# Altium PCB 2211B_SysArrosage_Auto_A.PcbDoc (part 1 of 2)
Units mm, origin at the board's own origin, x right, y up, seen from the top; angles counter-clockwise.
Board outline 107 x 107 mm, 2 copper layers (Top Layer, Bottom Layer), stack 1.586 mm thick; 94 components, 69 nets, 297 pads, 129 vias.
Unrouted connection lines stored in the file: 47.
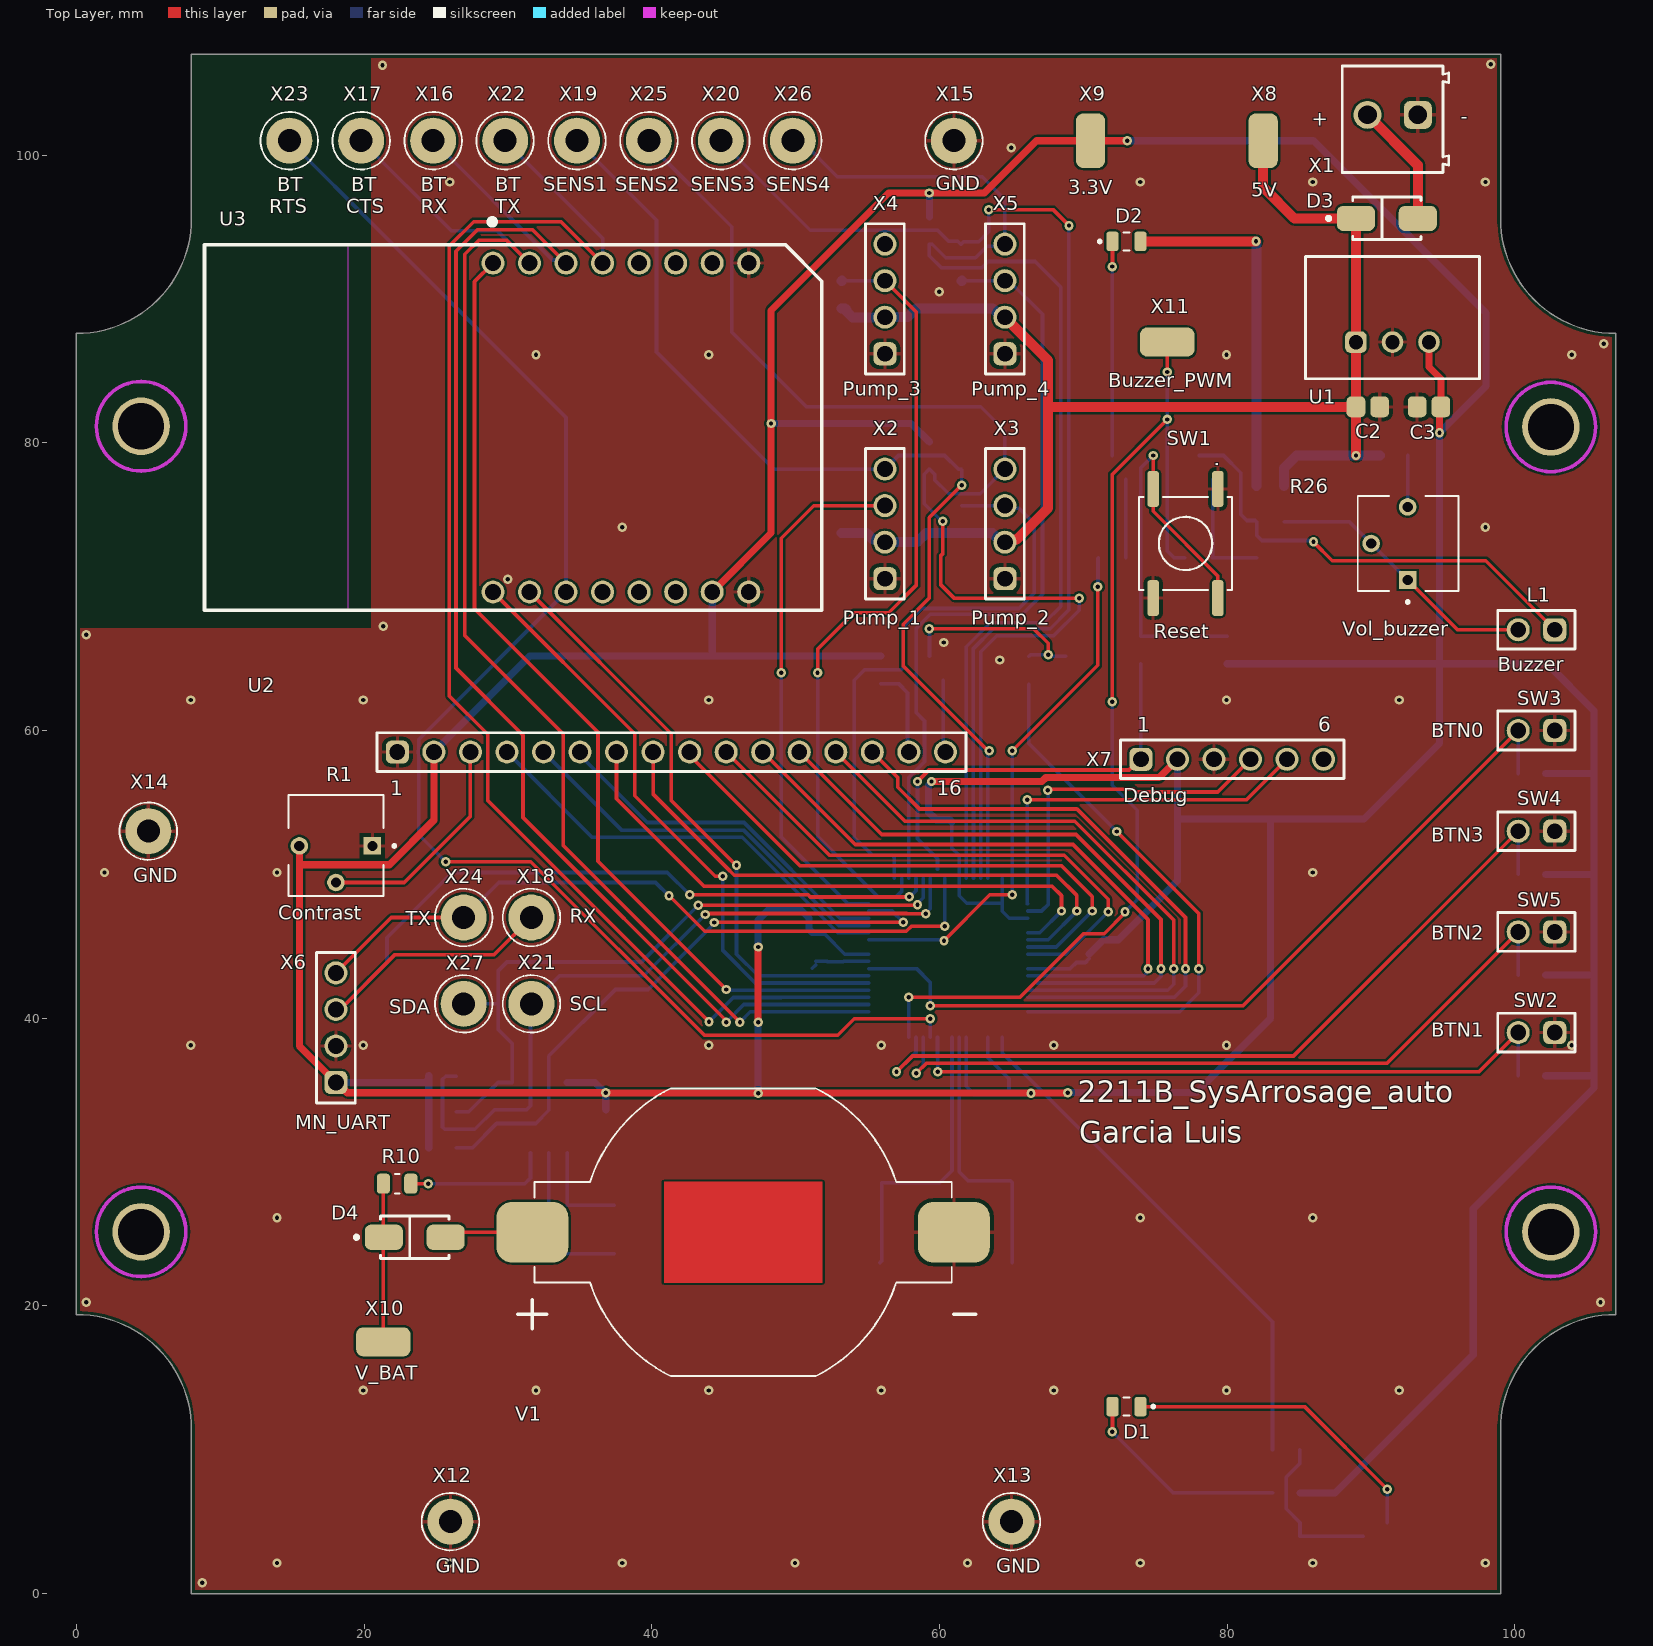
[diagram p0: Top Layer view]
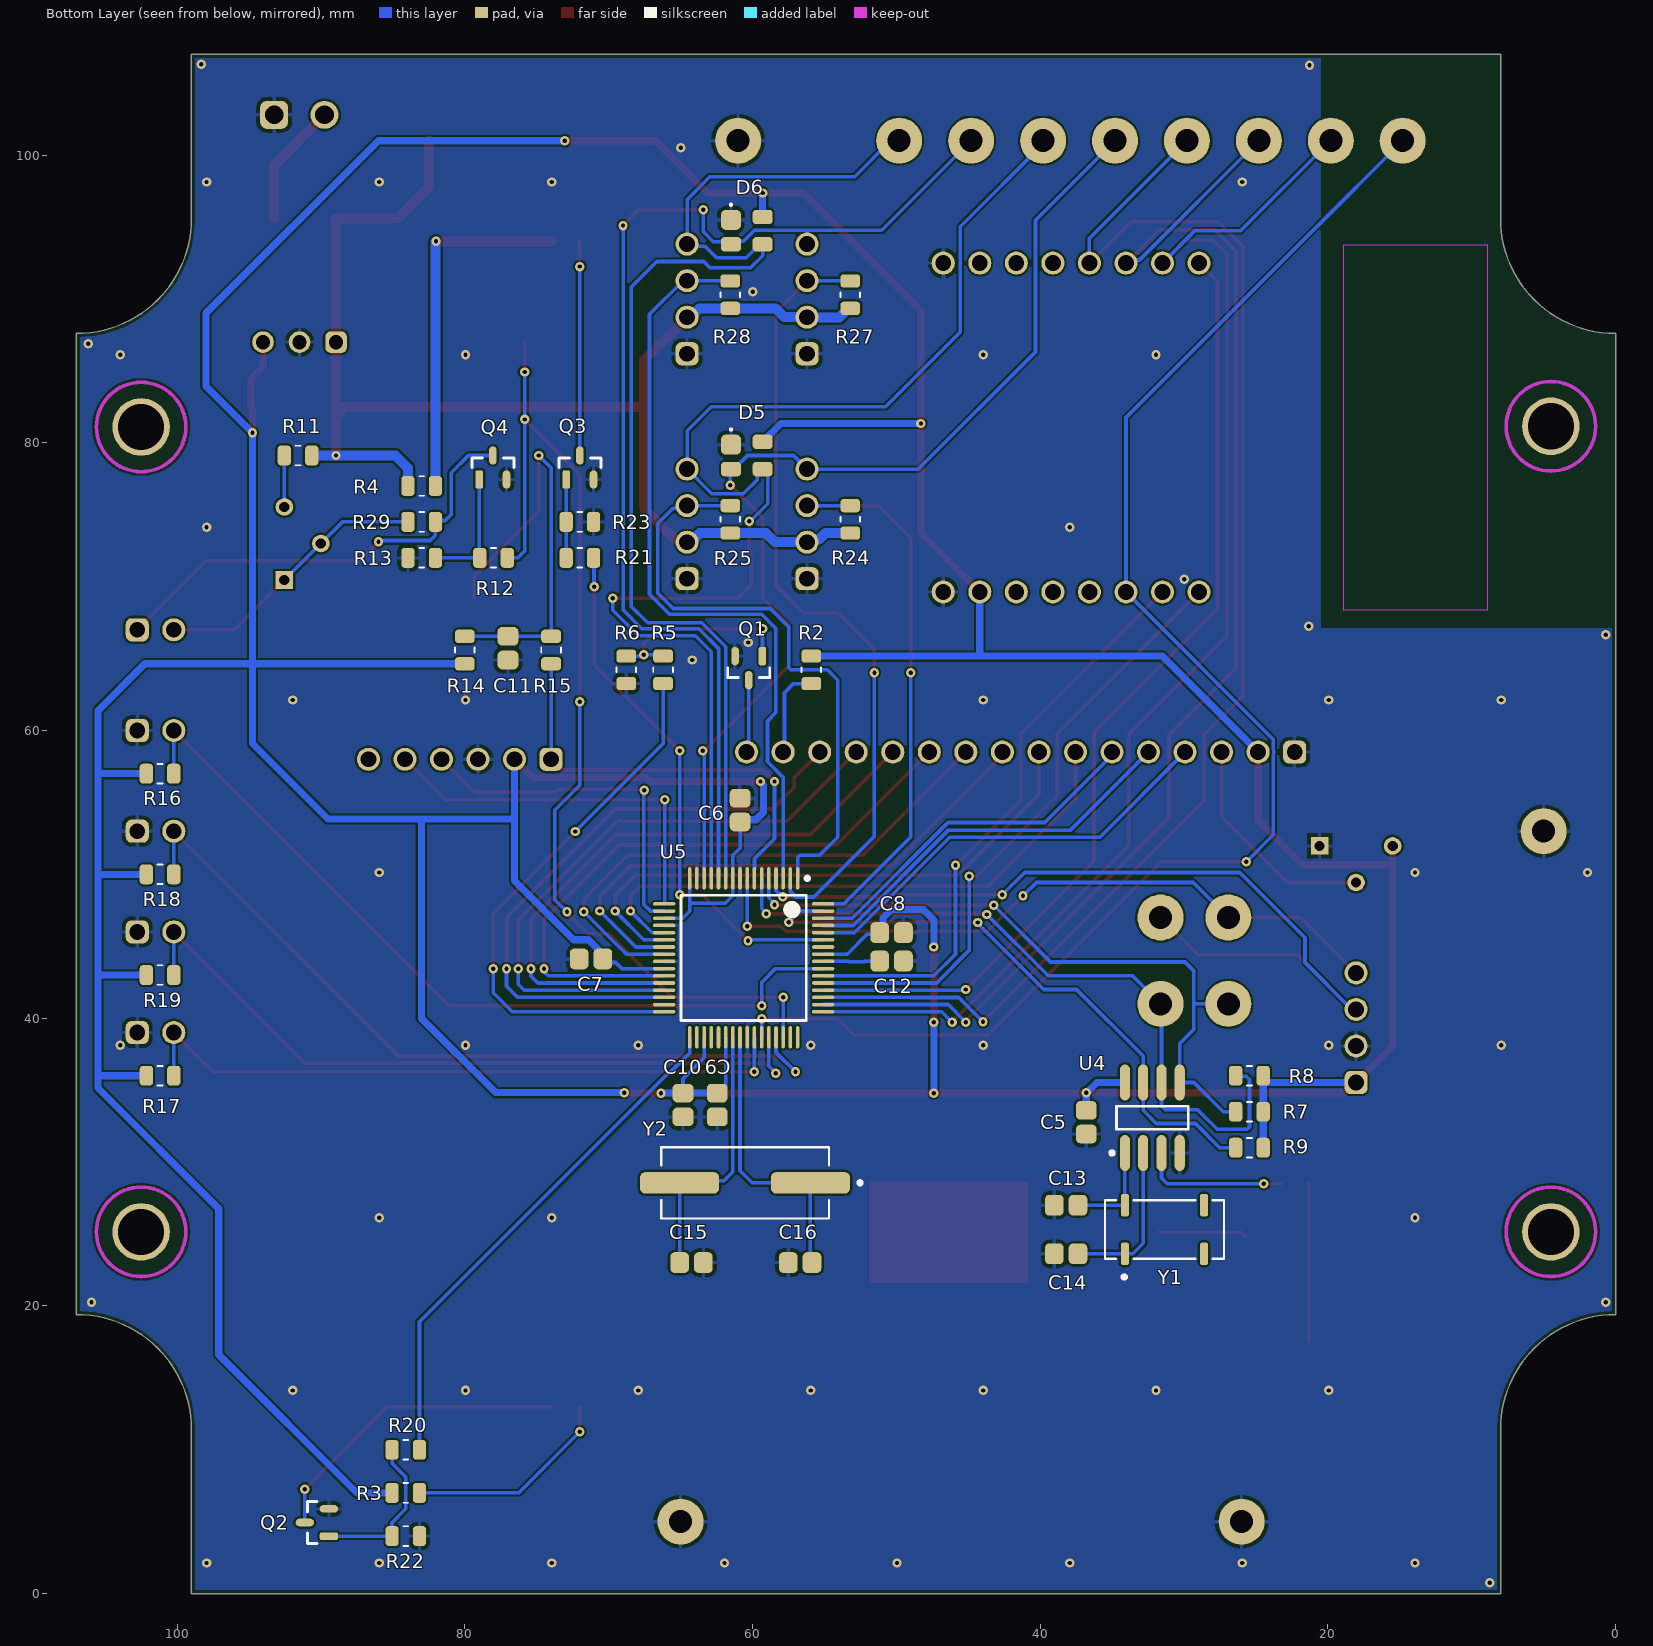
[diagram p1: Bottom Layer view, seen from below]
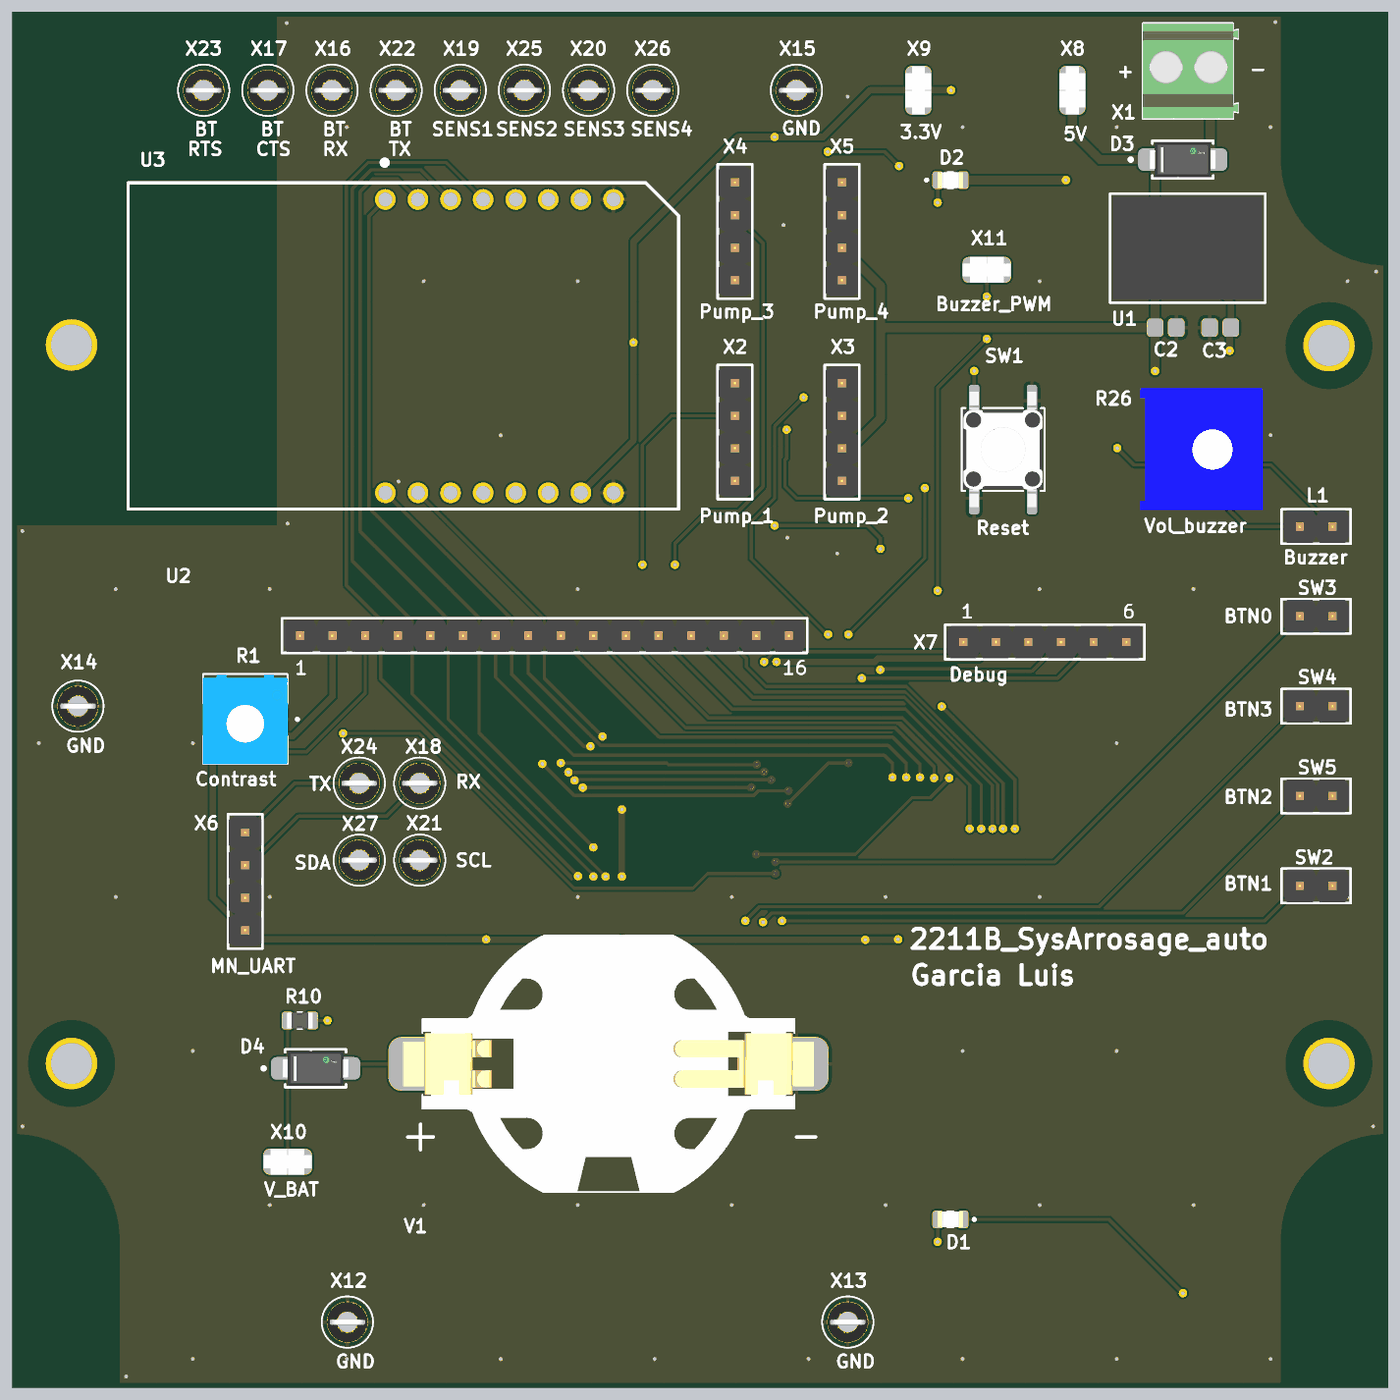
[diagram p2: 3D render of the assembled board from above, using the file's embedded part models]
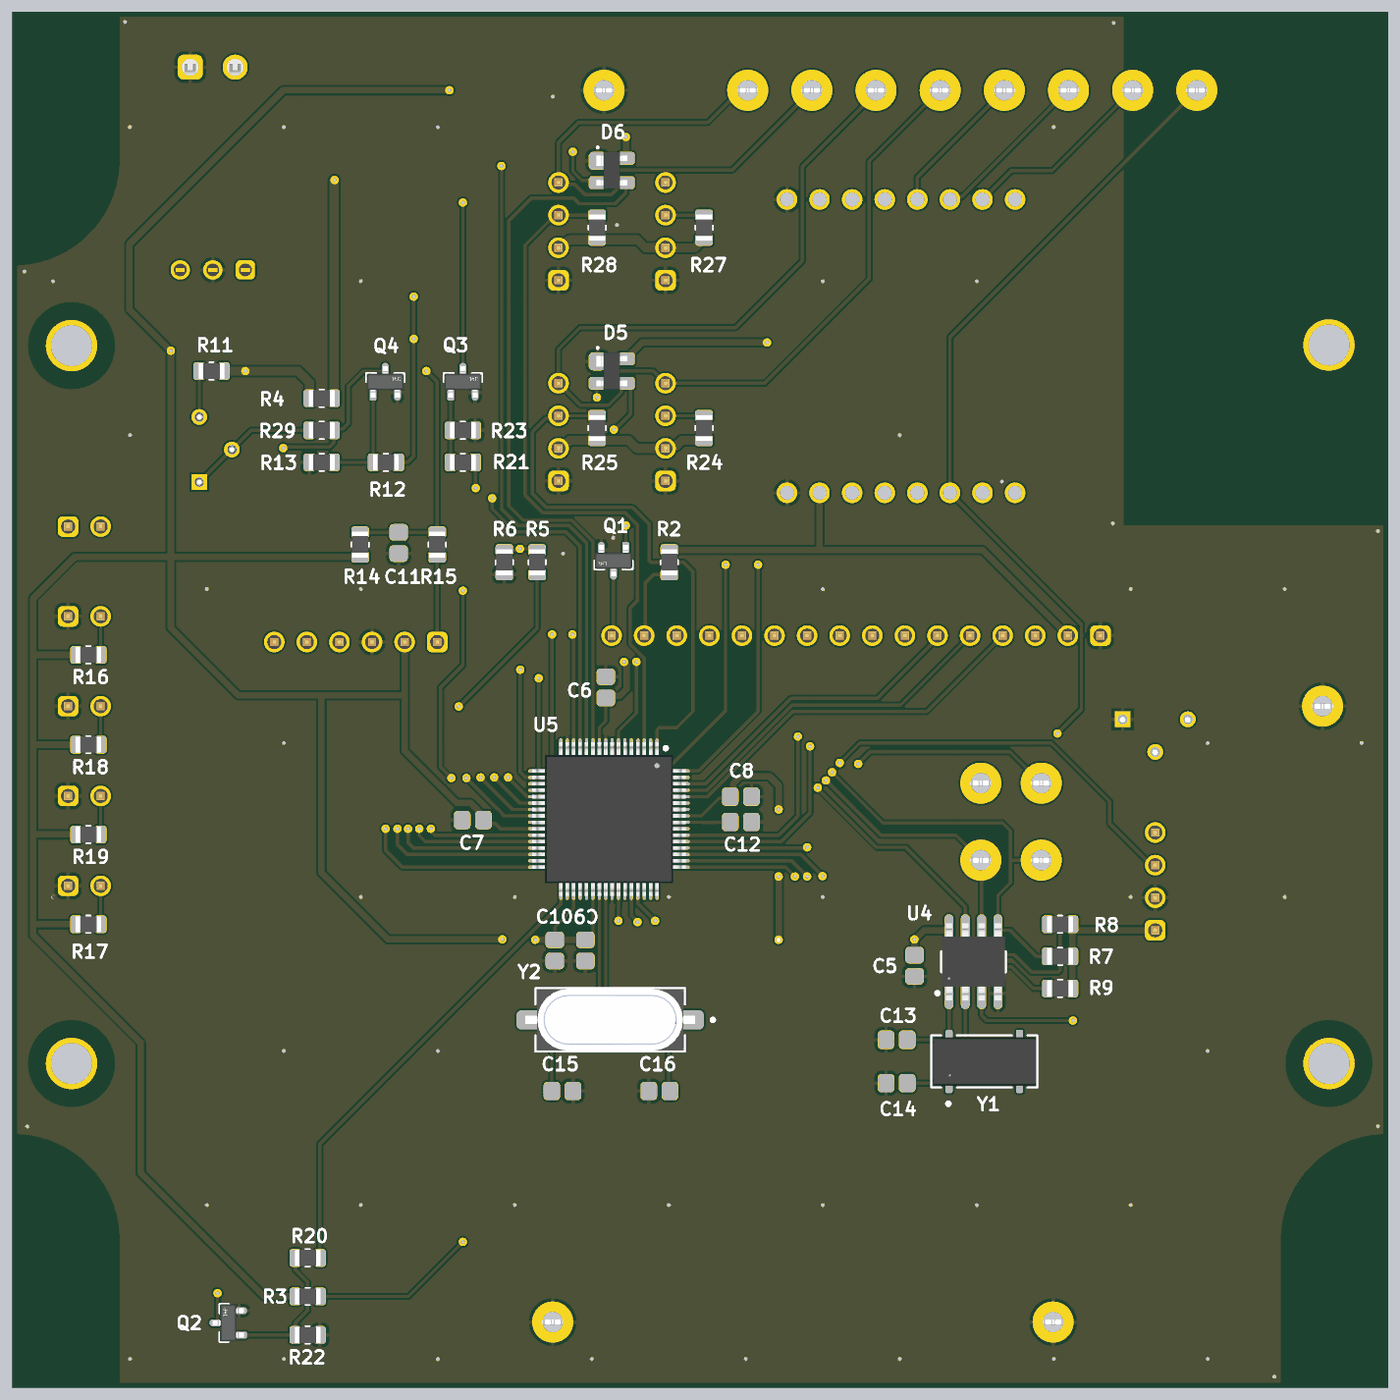
[diagram p3: 3D render of the assembled board from below, using the file's embedded part models]

## Layer stack, top to bottom
Top Solder: solder mask 0.0102, Solder Resist, Dk 3.5
Top Layer: signal copper 0.018
Dielectric1: core 1.55, FR-4, Dk 4.8
Bottom Layer: signal copper 0.018
Bottom Solder: solder mask 0.0102, Solder Resist, Dk 3.5

## Board outline
8,0 8,11.4 ccw(c0,11.4) 0,19.4 0,87.6 ccw(c0,95.6) 8,95.6 8,107 99,107 99,95.6 ccw(c107,95.6) 107,87.6 107,19.4 ccw(c107,11.4) 99,11.4 99,0

## Design rules (kind name [scope] priority, off if disabled: settings)
BoardOutlineClearance [All] p1: gap=0.25 ignorepadtopadclearanceinfootprint=FALSE except(0: Arc-SplitContinuation Track-SplitContinuation SMDPad-SplitContinuation THPad-SplitContinuation Via-SplitContinuation Fill-SplitContinuation Poly-SplitContinuation Region-SplitContinuation Text-SplitContinuation)
Clearance Clearance-xPP-xTP-xTT [All] p1: gap=0.151 ignorepadtopadclearanceinfootprint=TRUE
ComponentClearance [All] p1: gap=0.25 collisioncheckmode=3 verticalgap=0.25 showdistances=FALSE
DiffPairsRouting [All] p1: maxlimit=0.25 minlimit=0.25 mostfreqgap=0.25 toplayer_minwidth=0.381 toplayer_maxwidth=0.381 toplayer_prefwidth=0.381 bottomlayer_minwidth=0.381 bottomlayer_maxwidth=0.381 bottomlayer_prefwidth=0.381 maxuncoupledlength=12.5
Height [All] p1: minheight=0 maxheight=25 prefheight=12.5
HoleSize HoleSize-PTH [All] p1: absolutevalues=TRUE maxlimit=10 minlimit=0.25 maxpercent=80.000 minpercent=20.000
HoleToHoleClearance [All] p1: gap=0.35 allowstackedmicrovias=TRUE
MinimumAnnularRing "Minimum IAR  >0.45mm" [((ObjectKind = 'Pad') OR (ObjectKind = 'Via')) And (Layer = 'MultiLayer') And (HoleDiameter > AsMM(0.45))] p1: minimumring=0.125 // minimum inner annular ring for pads > 0.45mm finished hole size
MinimumAnnularRing "Minimum IAR <=0.45mm" [((ObjectKind = 'Pad') OR (ObjectKind = 'Via')) And (Layer = 'MultiLayer') And (HoleDiameter <= AsMM(0.45))] p2: minimumring=0.125 // minimum inner annular ring for pads <= 0.45mm finished hole size
MinimumSolderMaskSliver [All] p1: minsoldermaskwidth=0.08
PasteMaskExpansion [All] p1: expansion=-0.025
PlaneClearance PlaneClearance-IPI [All] p1: clearance=0.25
PlaneConnect [All] p1: planeconnectstyle=Relief reliefexpansion=0.175 reliefentries=4 reliefconductorwidth=0.2 reliefairgap=0.2
PolygonConnect PolygonConnect_GND [InNet('GND')] p1: thpad.connectstyle=Relief thpad.reliefconductorwidth=0.254 thpad.reliefentries=4 thpad.polygonreliefangle="90 Angle" thpad.airgapwidth=0.254 smdpad.connectstyle=Relief smdpad.reliefconductorwidth=0.254 smdpad.reliefentries=4 smdpad.polygonreliefangle="90 Angle" smdpad.airgapwidth=0.254 via.connectstyle=Direct via.reliefconductorwidth=0.254 via.reliefentries=4 via.polygonreliefangle="90 Angle" via.airgapwidth=0.254
PolygonConnect PolygonConnect-xTW [All] p2: connectstyle=Relief reliefconductorwidth=0.2 reliefentries=4 polygonreliefangle="90 Angle" airgapwidth=0.2
RoutingCorners [All] p1: cornerstyle=45-Degree minsetback=2.5 maxsetback=2.5
RoutingVias RoutingViasES [All] p1: holewidth=0.3 width=0.65 viastyle="Through Hole" minholewidth=0.25 minwidth=0.61 maxholewidth=0.45 maxwidth=0.8 // finishet hole size <= 0.45mm
SilkToSilkClearance [All] p1: silktosilkclearance=0.2
SilkToSolderMaskClearance SilkscreenOverComponentPads [IsPad] p1: minsilkscreentomaskgap=0.2 clearancetoexposedcopper=TRUE
SolderMaskExpansion [All] p1: expansion=0 istentingtop=FALSE
UnRoutedNet [All] p1: checkbadconnections=TRUE
Width Width-xTW [All] p1: maxlimit=1.5 minlimit=0.15 preferedwidth=0.2
17 further rules are at their usual default settings.

## Classes and differential pairs
component class 2211B_SysArrosageAuto_MCU: C6 C7 C8 C9 C10 C11 C12 C15 C16 D5 D6 R14 R15 R16 R17 R18 R19 SW1 SW2 SW3 SW4 SW5 U5 X7 X16 X17 X18 X19 X20 X21 X22 X23 X24 X25 X26 X27 Y2
component class 2211B_SysArrosage_auto: C2 C3 C5 C13 C14 D1 D2 D3 D4 L1 Q1 Q2 Q3 Q4 R1 R2 R3 R4 R5 R6 R7 R8 R9 R10 R11 R12 R13 R20 R21 R22 R23 R24 R25 R26 R27 R28 R29 U1 U2 U3 U4 V1 X1 X2 X3 X4 X5 X6 X8 X9 X10 X11 X12 X13 X14 X15 Y1

## Components (designator, comment, footprint, x,y, rotation, side; value= is the part's Value field where it differs from the comment)
C2 "10uF" CAPC2013X145X48NL20T23 89.775,82.5 r180 top
C3 "22uF" CAPC2013X145X48NL20T23 94.03,82.5 r0 top
C5 "100nF" CAPC2013X145X48NL20T23 36.795,32.771 r90 bottom
C6 "100nF" CAPC2013X145X48NL20T23 60.859,54.466 r270 bottom
C7 "100nF" CAPC2013X145X48NL20T23 71.225,44.125 r180 bottom
C8 "100nF" CAPC2013X145X48NL20T23 50.334,45.948 r0 bottom
C9 "100nF" CAPC2013X145X48NL20T23 62.45,33.966 r90 bottom
C10 "100nF" CAPC2013X145X48NL20T23 64.832,33.966 r90 bottom
C11 "100nF" CAPC2013X145X48NL20T23 77,65.722 r90 bottom
C12 "10uF" CAPC2013X145X48NL20T23 50.334,43.973 r0 bottom
C13 "10pF" CAPC2013X145X48NL20T23 38.198,27 r180 bottom
C14 "10pF" CAPC2013X145X48NL20T23 38.198,23.622 r180 bottom
C15 "22pF" CAPC2013X145X48NL20T23 64.242,23.008 r0 bottom
C16 "22pF" CAPC2013X145X48NL20T23 56.687,23.008 r180 bottom
D1 "LED_Red_2A-1K" LEDC2012X75N 73,13 r180 top
D2 "LED_Green_2A-1K" LEDC2012X75N 73,94 r0 top
D3 "SS14" FP-403AE-MFG 91.1,95.6 r180 top
D4 "SS14" FP-403AE-MFG 23.522,24.773 r180 top
D5 "8240136" WE-TVS_SOT143-4L 60.395,79.121 r270 bottom
D6 "8240136" WE-TVS_SOT143-4L 60.395,94.75 r270 bottom
L1 "CPT-2521C-500" 61300211121 101.5,67 r180 top
Q1 "IRLML2402TRPBF" FP-MICRO3-IPC_C 60.26,64.335 r270 bottom
Q2 "IRLML2402TRPBF" FP-MICRO3-IPC_C 90.285,4.94 r0 bottom
Q3 "IRLML2402TRPBF" FP-MICRO3-IPC_C 72,78.281 r90 bottom
Q4 "IRLML2402TRPBF" FP-MICRO3-IPC_C 78.05,78.281 r90 bottom
R1 "1K" TRIM_3362P-1-1K 18.04,51.975 r180 top
R2 "15R" RESC2012X60N 55.915,64.215 r90 bottom
R3 "56R" RESC2012X60N 84.1,7 r0 bottom
R4 "82R" RESC2012X60N 83,77 r0 bottom value=86R
R5 "180R" RESC2012X60N 66.215,64.215 r90 bottom
R6 "100k" RESC2012X60N 68.775,64.215 r90 bottom
R7 "2.2K" RESC2012X60N 25.455,33.5 r180 bottom value=2.2k
R8 "2.2K" RESC2012X60N 25.455,36 r180 bottom value=2.2k
R9 "10K" RESC2012X60N 25.455,31 r180 bottom value=10k
R10 "180R" RESC2012X60N 22.295,28.5 r180 top
R11 "150R" RESC2012X60N 91.59,79.117 r180 bottom
R12 "180R" RESC2012X60N 78,72 r180 bottom
R13 "100K" RESC2012X60N 83,72 r0 bottom value=100k
R14 "10K" RESC2012X60N 80,65.592 r270 bottom value=10k
R15 "1k" RESC2012X60N 74,65.592 r270 bottom
R16 "10k" RESC2012X60N 101.185,57 r0 bottom
R17 "10k" RESC2012X60N 101.185,36 r0 bottom
R18 "10k" RESC2012X60N 101.186,50 r0 bottom
R19 "10k" RESC2012X60N 101.185,43 r0 bottom
R20 "180R" RESC2012X60N 84.1,10 r180 bottom
R21 "180R" RESC2012X60N 72,72 r180 bottom
R22 "100k" RESC2012X60N 84.1,4 r0 bottom
R23 "100k" RESC2012X60N 72,74.5 r0 bottom
R24 "10k" RESC2012X60N 53.205,74.676 r270 bottom
R25 "10k" RESC2012X60N 61.545,74.676 r270 bottom
R26 "5k" TRIM_3386P-1-502LF_5K 92.545,73 r90 top
R27 "10k" RESC2012X60N 53.205,90.3 r270 bottom
R28 "10k" RESC2012X60N 61.545,90.3 r270 bottom
R29 "1k" RESC2012X60N 83,74.5 r0 bottom
SW1 "430182043816" SOIC_82043816_WRE-L 77.1,73 r270 top
SW2 "Single-Pole,Single-Throw Switch" 61300211121 101.5,39 r180 top
SW3 "Single-Pole,Single-Throw Switch" 61300211121 101.5,60 r180 top
SW4 "Single-Pole,Single-Throw Switch" 61300211121 101.5,53 r180 top
SW5 "Single-Pole,Single-Throw Switch" 61300211121 101.5,46 r180 top
U1 "173950336" WPME-FDSM_SIP-3_L11.6W7.55H10.16 91.49,88.7 r0 top
U2 "NHD-0420AZ-FSW-GBW-33V3" NHD-0420AZ-FSW-GBW-33V3 12.31,61 r0 top locked
U3 "MIKROE-2545" "RN4678 CLICK V3" 8.91,68.36 r90 top
U4 "MCP79411-I" SOIC-SN8_M 32.205,33.081 r90 bottom
U5 "PIC32MX795F512HT-80I/PT" TQFP-PT64_L 60.615,44.198 r270 bottom
V1 "Pile 3V" BAT_BU2032SM-HD-G 46.35,25.122 r0 top
X1 "Header 1x2" 691214110002 91.5,102.5 r180 top
X2 "4P_header" 61300411121 56.205,74.361 r90 top
X3 "4P_header" 61300411121 64.544,74.361 r90 top
X4 "4P_header" 61300411121 56.205,90 r90 top
X5 "4P_header" 61300411121 64.545,90 r90 top
X6 "4P_header" 61300411121 18.04,39.341 r90 top
X7 "61300611121" 61300611121 80.35,58 r0 top
X8 "5019" KEYSTONE_5019 82.5,101 r90 top value=5011
X9 "5019" KEYSTONE_5019 70.5,101 r90 top value=5011
X10 "5019" KEYSTONE_5019 21.34,17.5 r180 top value=5011
X11 "5019" KEYSTONE_5019 75.831,87 r0 top value=5011
X12 "5011" Keystone_5011 26,5 r90 top
X13 "5011" Keystone_5011 65,5 r90 top
X14 "5011" Keystone_5011 5,53 r90 top
X15 "5011" Keystone_5011 61,101 r90 top
X16 "5011" Keystone_5011 24.8,101 r90 top
X17 "5011" Keystone_5011 19.8,101 r90 top
X18 "5011" Keystone_5011 31.635,47 r90 top
X19 "5011" Keystone_5011 34.8,101 r90 top
X20 "5011" Keystone_5011 44.8,101 r90 top
X21 "5011" Keystone_5011 31.635,41 r90 top
X22 "5011" Keystone_5011 29.8,101 r90 top
X23 "5011" Keystone_5011 14.8,101 r90 top
X24 "5011" Keystone_5011 26.925,47 r90 top
X25 "5011" Keystone_5011 39.8,101 r90 top
X26 "5011" Keystone_5011 49.8,101 r90 top
X27 "5011" Keystone_5011 26.925,41 r90 top
Y1 "32.7680 kHz" SOJ_MC-306_EPS-M 31.36,25.311 r90 bottom
Y2 "8 MHz" ATS080BSM-1 60.52,28.553 r0 bottom

## Footprints (in the part's own frame and the unit in brackets; to place one, negate y for a bottom-side part, rotate by r counter-clockwise, add the part's x,y. Pads: shape width x height; smd on the part's side, far side on the other; paste and mask are expansions set on the pad)
61300211121 [mm] "Pin Header, pitch 2.54 mm, THT, Vertical, single row, 2p"
  rrect50% 1.6x1.6 hole 1.1: 1(-1.27,0)
  round 1.6 hole 1.1: 2(1.27,0)
  silkscreen extent -2.69,-1.35 2.69,1.35, body extent -2.54,-1.27 2.54,1.27, height 8.57
61300411121 [mm] "Pin Header, pitch 2.54 mm, THT, Vertical, single row, 4p"
  rrect50% 1.6x1.6 hole 1.1: 1(-3.81,0)
  round 1.6 hole 1.1: 2(-1.27,0) 3(1.27,0) 4(3.81,0)
  silkscreen extent -5.23,-1.35 5.23,1.35, body extent -5.08,-1.27 5.08,1.27, height 8.57
61300611121 [mm] "Pin Header, pitch 2.54 mm, THT, Vertical, single row, 6p"
  rrect50% 1.6x1.6 hole 1.1: 1(-6.35,0)
  round 1.6 hole 1.1: 2(-3.81,0) 3(-1.27,0) 4(1.27,0) 5(3.81,0) 6(6.35,0)
  silkscreen extent -7.77,-1.35 7.77,1.35, body extent -7.62,-1.27 7.62,1.27, height 8.57
691214110002 [mm] "3.50 mm Horizontal Entry Modular, 2p"
  rrect50% 1.95x1.95 hole 1.3: 1(-1.75,-0.3)
  round 1.95 hole 1.3: 2(1.75,-0.3)
  silkscreen extent -3.9,-3.7 3.5,3.7, body extent -3.95,-3.7 3.5,3.7, height 8.55
ATS080BSM-1 [mm]
  rrect50% 5.5x1.5 smd paste+0 mask+0: 1(-4.547,0) 2(4.547,0)
  silkscreen extent -8.12,-2.48 5.83,2.48, body extent -6.6,-2.4 6.6,2.4, height 3.2
BAT_BU2032SM-HD-G [mm]
  rrect50% 5x4.2 smd: 1(-14.65,0) 2(14.65,0)
  Top Layer region: 5.5,-3.5 -5.5,-3.5 -5.5,3.5 5.5,3.5
  silkscreen extent -15.65,-10 16.15,10, body extent -16,-10 16,10, height 5.3
CAPC2013X145X48NL20T23 [mm] "Chip Capacitor, 2-Leads, Body 2.00x1.25mm, IPC Medium Density"
  rrect50% 1.3x1.45 smd: 1(-0.825,0) 2(0.825,0)
  body extent -1.1,-0.72 1.1,0.72, height 1.45
FP-403AE-MFG [mm]
  rrect50% 2.65x1.75 smd paste+0 mask+0: 1(-2.15,0) 2(2.15,0)
  silkscreen extent -2.37,-1.48 4.17,1.48, body extent -3.57,-1.58 3.57,1.58, height 0.25
FP-MICRO3-IPC_C [mm]
  rrect50% 1.274x0.532 smd paste+0 mask+0: 1(-0.835,0.95)
  rrect100% 1.274x0.532 smd paste+0 mask+0: 2(-0.835,-0.95) 3(0.835,0)
  silkscreen extent 0,-1.46 0.65,1.46, body extent -1.22,-1.46 1.22,1.46, height 1.12
Keystone_5011 [mm]
  round 3.2 hole 1.6 paste-100: 1(0,0)
  silkscreen extent -2,-2 2,2, body extent -1.59,-1.59 1.59,1.59, height 8.13
KEYSTONE_5019 [mm]
  rrect50% 3.8x2.03 smd: 1(0,0)
  body extent -1.91,-1.01 1.91,1.01, height 2.29
LEDC2012X75N [mm]
  rrect50% 0.86x1.36 smd: 1(-0.975,0) 2(0.975,0)
  silkscreen extent -1.96,-0.63 0.22,0.63, body extent -1,-0.63 1,0.63, height 0.75
NHD-0420AZ-FSW-GBW-33V3 [mm]
  rrect50% 1.6x1.6 hole 1.1: 1(10,-2.5)
  round 1.6 hole 1.1: 2(12.54,-2.5) 3(15.08,-2.5) 4(17.62,-2.5) 5(20.16,-2.5) 6(22.7,-2.5) 7(25.24,-2.5) 8(27.78,-2.5) 9(30.32,-2.5) 10(32.86,-2.5) 11(35.4,-2.5) 12(37.94,-2.5) 13(40.48,-2.5) 14(43.02,-2.5) 15(45.56,-2.5) 16(48.1,-2.5)
  silkscreen extent 8.58,-3.85 49.52,-1.15, body extent 8.73,-3.77 49.37,-1.23, height 8.57
RESC2012X60N [mm]
  rrect50% 0.92x1.38 smd: 1(-0.955,0) 2(0.955,0)
  silkscreen extent -0.17,-0.68 0.17,0.68, body extent -1,-0.63 1,0.63, height 0.6
"RN4678 CLICK V3" [mm]
  round 1.6 hole 1.1: 1(24.13,-20.05) 2(24.13,-22.59) 3(24.13,-25.13) 4(24.13,-27.67) 5(24.13,-30.21) 6(24.13,-32.75) 7(24.13,-35.29) 8(24.13,-37.83) 9(1.27,-37.83) 10(1.27,-35.29) 11(1.27,-32.75) 12(1.27,-30.21) 13(1.27,-27.67) 14(1.27,-25.13) 15(1.27,-22.59) 16(1.27,-20.05)
  Keep-Out Layer region: 0,-10 25.4,-10 25.4,0 0,0
  silkscreen extent 0,-42.9 27.15,0
SOIC-SN8_M [mm] "SOIC, 8-Leads, Body 4.9x3.9mm, Pitch 1.27mm, IPC Low Density"
  oval 2.5x0.7 smd: 1(-2.45,1.905) 2(-2.45,0.635) 3(-2.45,-0.635) 4(-2.45,-1.905) 5(2.45,-1.905) 6(2.45,-0.635) 7(2.45,0.635) 8(2.45,1.905)
  silkscreen extent -2.57,-2.5 0.8,2.93, body extent -3,-2.45 3,2.45, height 1.76
SOIC_82043816_WRE-L [mm]
  rrect50% 2.5x0.8 smd paste+0 mask+0: 1(-3.797,2.25) 2(-3.797,-2.25) 3(3.797,-2.25) 4(3.797,2.25)
  silkscreen extent -3.23,-3.23 3.23,3.23, body extent -4.5,-3.1 4.5,3.1, height 4.3
SOJ_MC-306_EPS-M [mil]
  rrect50% 61x22 smd paste+0 mask+0: 1(-66.5,108.27) 2(-66.5,-108.27) 3(66.5,-108.27) 4(66.5,108.27)
  silkscreen extent -135,-162 80,162, body extent -75,-160 75,155, height 67
TQFP-PT64_L [mm] "Thin QFP, 64-Leads, Body 10x10mm, Pitch 0.5mm, IPC High Density"
  oval 1.55x0.25 smd: 1(-5.525,3.75) 2(-5.525,3.25) 3(-5.525,2.75) 4(-5.525,2.25) 5(-5.525,1.75) 6(-5.525,1.25) 7(-5.525,0.75) 8(-5.525,0.25) 9(-5.525,-0.25) 10(-5.525,-0.75) 11(-5.525,-1.25) 12(-5.525,-1.75) 13(-5.525,-2.25) 14(-5.525,-2.75) 15(-5.525,-3.25) 16(-5.525,-3.75) 33(5.525,-3.75) 34(5.525,-3.25) 35(5.525,-2.75) 36(5.525,-2.25) 37(5.525,-1.75) 38(5.525,-1.25) 39(5.525,-0.75) 40(5.525,-0.25) 41(5.525,0.25) 42(5.525,0.75) 43(5.525,1.25) 44(5.525,1.75) 45(5.525,2.25) 46(5.525,2.75) 47(5.525,3.25) 48(5.525,3.75)
  oval 0.25x1.55 smd: 17(-3.75,-5.525) 18(-3.25,-5.525) 19(-2.75,-5.525) 20(-2.25,-5.525) 21(-1.75,-5.525) 22(-1.25,-5.525) 23(-0.75,-5.525) 24(-0.25,-5.525) 25(0.25,-5.525) 26(0.75,-5.525) 27(1.25,-5.525) 28(1.75,-5.525) 29(2.25,-5.525) 30(2.75,-5.525) 31(3.25,-5.525) 32(3.75,-5.525) 49(3.75,5.525) 50(3.25,5.525) 51(2.75,5.525) 52(2.25,5.525) 53(1.75,5.525) 54(1.25,5.525) 55(0.75,5.525) 56(0.25,5.525) 57(-0.25,5.525) 58(-0.75,5.525) 59(-1.25,5.525) 60(-1.75,5.525) 61(-2.25,5.525) 62(-2.75,5.525) 63(-3.25,5.525) 64(-3.75,5.525)
  silkscreen extent -5.65,-4.35 4.35,4.55, body extent -6,-6 6,6, height 1.2
TRIM_3362P-1-1K [mm]
  rect 1.222x1.222 hole 0.714: 1(-2.54,0)
  round 1.222 hole 0.714: 2(0,2.54) 3(2.54,0)
  silkscreen extent -4.16,-3.53 3.3,3.47, body extent -3.3,-3.49 3.3,3.49, height 4.88
TRIM_3386P-1-502LF_5K [mm]
  rect 1.222x1.222 hole 0.714: 1(-2.54,0)
  round 1.222 hole 0.714: 2(0,2.54) 3(2.54,0)
  silkscreen extent -4.16,-3.53 3.3,3.47, body extent -4.76,-4.76 4.76,4.76, height 4.83
WE-TVS_SOT143-4L [mm] "TVS Diode, package SOT143-4L"
  rrect50% 1.4x1.4 smd: 1(-0.75,-1.1)
  rrect50% 1x1.4 smd: 2(0.95,-1.1) 3(0.95,1.1) 4(-0.95,1.1)
  silkscreen extent -1.87,-1.18 -1.73,-1.03, body extent -1.46,-1.2 1.46,1.2, height 1.05
WPME-FDSM_SIP-3_L11.6W7.55H10.16 [mm] "Fixed Step Down Regulator Module, SIP-3, body 11.60x7.55mm"
  rrect50% 1.5x1.5 hole 1: 1(-2.54,-1.7)
  round 1.5 hole 1: 2(0,-1.7) 3(2.54,-1.7)
  silkscreen extent -6.05,-4.25 6.05,4.25, body extent -5.8,-4 5.8,4, height 10.5

## Part data
C2 C3 C5 C6 C7 C8 C9 C10 C11 C12 C13 C14 C15 C16: library part Capacitor_Non-Polarized
  C2 C12: Capacité=10uF
  C3: Capacité=22uF
  C5 C6 C7 C8 C9 C10 C11: Capacité=100nF
  C13 C14: Capacité=10pF
  C15 C16: Capacité=22pF
D1: "LED Uni-Color Hyper Red 640nm 2-Pin Chip LED T/R", Case Code (Imperial)=0805, Case Code (Metric)=2012, Color=Red, Forward Current=20mA, Forward Voltage=2.2V, Lens Color=Colorless, Manufacturer=Kingbright, Manufacturer Part Number=APT2012SECK/J3-PRV, Max Operating Temperature=85°C, Min Operating Temperature=-40°C, Package Quantity=1, Supplier Part Number=754-1791-1-ND, Case/Package=0805, Category=LEDs, ComponentLink1Description=https://datasheet.ciiva.com/24022/apt2012seck-j3-prv-262303-24022777.pdf?src-supplier=Mouser, ComponentLink1URL=https://datasheet.ciiva.com/24022/apt2012seck-j3-prv-262303-24022777.pdf?src-supplier=Mouser, ComponentLink2Description=https://datasheet.ciiva.com/29562/apt2012seck-j3-prv-29562108.pdf?src-supplier=Digikey, ComponentLink2URL=https://datasheet.ciiva.com/29562/apt2012seck-j3-prv-29562108.pdf?src-supplier=Digikey, Dominant Wavelength=625nm, Height=0.75mm, Illumination Color=Red, Lead Free="Lead Free", Length=2mm, Lens Size=1.25mm, Lens Style=Flat, Lens Transparency=Clear, Luminous Intensity=350mcd, Mounting Technology="Surface Mount", Packaging="Tape and Reel", Pricing="1=0.6, 10=0.368, 100=0.2114, 1000=0.16544 (USD)", RoHS=Yes, RoHS Compliant=Yes, Series=HELI2, Stock=46358, Supplier=Digikey, Test Current=20mA, Viewing Angle=120°, Width=1.25mm
D2: "LED Uni-Color Green 515nm 2-Pin SMD T/R", Case Code (Imperial)=0805, Case Code (Metric)=2012, Color=Green, Forward Voltage=3.3V, Lens Color=Colorless, Manufacturer=Kingbright, Manufacturer Part Number=APHCM2012ZGCK-F01, Supplier Part Number=754-2120-1-ND, Test Current=20mA, Case/Package=0805, Category=LEDs, ComponentLink1Description=http://www.kingbrightusa.com/images/catalog/SPEC/APHCM2012ZGCK-F01.pdf?src-supplier=Digikey, ComponentLink1URL=http://www.kingbrightusa.com/images/catalog/SPEC/APHCM2012ZGCK-F01.pdf?src-supplier=Digikey, Dominant Wavelength=525nm, Height=0.5mm, Length=2mm, Lens Size=1.2mm, Lens Style=Flat, Lens Transparency=Clear, Luminous Intensity=350mcd, Mounting Technology="Surface Mount", Packaging="Cut Tape", Pricing="1=0.51, 10=0.311, 100=0.1789, 1000=0.13999 (USD)", RoHS=Yes, RoHS Compliant=Yes, Series=-, Stock=17088, Supplier=Digikey, Viewing Angle=110°, Width=1.25mm
D3 D4: library part CMP-2000-04943-2, "DIODE SCHOTTKY 40V 1A SMA", Forward Current=1A, Manufacturer="ON Semiconductor", Max Junction Temp=+125°C, Max Repetitive Reverse Voltage=40V, Max Surge Forward Current=40A, Package=403AE, Peak Reverse Current=0.2mA, Temperature="-65°C to +125°C", Temperature Range Low=-65°C, Automotive=No, Category=Diode, ComponentLink2Description=Datasheet, ComponentLink2URL=https://www.onsemi.com/pub/Collateral/SS19-D.PDF, Device Class L1="Discrete Semiconductors", Device Class L2=Diodes, Device Class L3="Schottky Diodes", Digikey Description="DIODE SCHOTTKY 40V 1A SMA", Height=2.5mm, Lead Free=Yes, Manufacturer Part Number=SS14, Mouser Description="Schottky Diodes & Rectifiers SMA 40V 1.0A", Octopart=https://octopart.com/ss14-on+semiconductor-29205033, RoHS=TRUE, Standoff Height=0.05mm, Temperature Range High=+125°C
D5 D6: library part CMP-1486-00002-2, Breakdown Voltage=4.5V, Capacitance=3pF, Case/Package=SOT-143, Clamping Voltage=6V, Leakage Current=5µA, Max Operating Temperature=125°C, Max Reverse Leakage Current=5A, Max Surge Current=12A, Min Operating Temperature=-55°C, Operating Supply Voltage=3.8V, Power Line Protection=Yes, Reverse Standoff Voltage=3.3V, Test Current=1mA, Direction=Unidirectional, Element Configuration=Dual, ESD Protection=Yes, Height=1.06mm, Length=2.92mm, Max Breakdown Voltage=4.5V, Min Breakdown Voltage=4.5V, Mount="Surface Mount", NexarPartId=18190099, Number of Bidirectional Channels=2, Number of Channels=2, Number of Pins=4, Packaging=Digi-Reel®, Peak Pulse Current=12A, Polarity=Bidirectional, REACH SVHC=Unknown, RoHS=Compliant, Termination=SMD/SMT, Width=2.4mm, Working Voltage=3.3V
L1: library part Buzzer, "AUDIO PIEZO TRANSDUCER 50V CHAS", Manufacturer="CUI Devices", Supplier Part Number=102-3756-ND, Category=Buzzers, ComponentLink1Description=https://www.cuidevices.com/product/resource/digikeypdf/cpt-2521c-500.pdf?src-supplier=Digikey, ComponentLink1URL=https://www.cuidevices.com/product/resource/digikeypdf/cpt-2521c-500.pdf?src-supplier=Digikey, Manufacturer Part Number=CPT-2521C-500, Pricing="1=5.57, 10=4.594, 30=4.23467, 60=3.97467, 90=3.72456, 450=3.29809 (USD)", RoHS=No, Stock=2415, Supplier=Digikey
Q1 Q2 Q3 Q4: library part CMP-32901-000179-1, "MOSFET N-CH 20V 1.2A SOT-23", Case/Package=SOT-23, Continuous Drain Current (ID)=1.2A, Drain to Source Breakdown Voltage=20V, Drain to Source Resistance=350mR, Gate to Source Voltage (Vgs)=12V, Input Capacitance=110pF, Manufacturer=Infineon, Max Operating Temperature=150°C, Max Power Dissipation=540mW, Min Operating Temperature=-55°C, Power Dissipation=540W, Threshold Voltage=700mV, Contact Plating=Tin, Drain to Source Voltage (Vdss)=20V, Element Configuration=Single, Halogen Free="Halogen Free", Height=0.04inch, Lead Free="Lead Free", Length=0.119inch, Manufacturer Part Number=IRLML2402TRPBF, Max Dual Supply Voltage=20V, Mount="Surface Mount", Number of Pins=3, Packaging="Tape and Reel", Rds On Max=250mR, REACH SVHC="No SVHC", Rise Time=9.5ns, Turn-Off Delay Time=9.7ns, Turn-On Delay Time=2.5ns, Width=0.055inch
R1: library part RPot, "In a Tube of 50, 1kO Through Hole Trimmer Potentiometer 0.5W Top Adjust Bourns 3362 Series", Color=48Colour, Manufacturer=Bourns, Manufacturer Part Number=3362P-1-102LF, Manufacturer Series=3362, Max Operating Temperature=125°C, Max Power Dissipation=500mW, Min Operating Temperature=-55°C, Package Quantity=250, Resistance=1kR, Resistance Law=Linear, Resistance Tolerance=10%, Resistor Type=Cermet, Temperature Coefficient=100ppm/°C, Voltage Rating=300V, Actuator Orientation=Vertical, Actuator Type=SCREW, Category="Variable Resistors and Potentiometers", ComponentLink1Description="Manufacturer Link", ComponentLink1URL=http://bourns.com/2/search.html, ComponentLink2Description=https://datasheet.ciiva.com/11831/0900766b8069ccf8-11831281.pdf?src-supplier=Rs, ComponentLink2URL=https://datasheet.ciiva.com/11831/0900766b8069ccf8-11831281.pdf?src-supplier=Rs, ComponentLink3Description=https://datasheet.ciiva.com/19466/854663-19466804.pdf?src-supplier=Jameco, ComponentLink3URL=https://datasheet.ciiva.com/19466/854663-19466804.pdf?src-supplier=Jameco, ComponentLink4Description=https://datasheet.ciiva.com/29122/447329-da-01-en-trimmer-tht3362p-1-102lf-1k-0-5w-29122260.pdf?src-supplier=Conrad, ComponentLink4URL=https://datasheet.ciiva.com/29122/447329-da-01-en-trimmer-tht3362p-1-102lf-1k-0-5w-29122260.pdf?src-supplier=Conrad, ComponentLink5Description=https://datasheet.ciiva.com/14108/mk3362-dat-e-14108840.pdf?src-supplier=Distrelec, ComponentLink5URL=https://datasheet.ciiva.com/14108/mk3362-dat-e-14108840.pdf?src-supplier=Distrelec, ComponentLink6Description=https://datasheet.ciiva.com/3266/3362-3266298.pdf?src-supplier=Avnet, ComponentLink6URL=https://datasheet.ciiva.com/3266/3362-3266298.pdf?src-supplier=Avnet, ComponentLink7Description=https://datasheet.ciiva.com/2156/3362-2156394.pdf?src-supplier=Digikey, ComponentLink7URL=https://datasheet.ciiva.com/2156/3362-2156394.pdf?src-supplier=Digikey, ComponentLink8Description=https://datasheet.ciiva.com/30213/3362-30213113.pdf?src-supplier=Onlinecomponents.com, ComponentLink8URL=https://datasheet.ciiva.com/30213/3362-30213113.pdf?src-supplier=Onlinecomponents.com, ComponentLink9Description=https://datasheet.ciiva.com/16715/70153603-16715030.pdf?src-supplier=Allied+Electronics, ComponentLink9URL=https://datasheet.ciiva.com/16715/70153603-16715030.pdf?src-supplier=Allied+Electronics, DatasheetVersion=Oct-2003, Depth=6.99mm, Height=0.185inch, Lead Diameter=0.46mm, Lead Free="Contains Lead", Length=6.6mm, Military Standard=Not, Mount="Through Hole,PCB", Number of Pins=3, Number of Turns=1, PackageDescription="Square Trimming Potentiometer", PackageReference=POT4MM-2, Packaging=Rail/Tube, Power Rating=500mW, Pricing 1="250=0,5725, 500=0,5525, 1000=0,5024, 2500=0,4458, 10000=0,4425 (USD)", Published=17-Dec-2003, Publisher="Altium Limited", Radiation Hardening=No, Reach SVHC Compliant=No, RoHS=Yes, RoHS Compliant=Yes, Series="Trimpot® 3362 - Sealed", Stock 1=2500, Supplier 1="Arrow Electronics", Supplier Part Number 1=3362P-1-102LF, Taper=Linear, Technology=CERMET, Terminal Finish=Tin, Termination=Pin, Tolerance=10%, Type=Potentiometer, Voltage Rating (AC)=300V, Voltage Rating (DC)=300V, Weight=0.02oz, Width=6.6mm
R2 R3 R4 R5 R6 R7 R8 R9 R10 R11 R12 R13 R14 R15 R16 R17 R18 R19 R20 R21 R22 R23 R24 R25 R27 R28 R29: library part R-SMD, "SMD Chip Resistor, 10 kOhm, ± 1%, 125 mW, 0805 [2012 Metric], Thick Film, General Purpose", Case Code (Imperial)=0805, Case Code (Metric)=2012, Manufacturer=Yageo, Manufacturer Part Number=RC0805FR-0710KL, Max Operating Temperature=155°C, Max Power Dissipation=125mW, Min Operating Temperature=-55°C, Package Quantity=1, Resistance Tolerance=1%, Resistor Type="Thick Film", Supplier Part Number=6185163, Temperature Coefficient=100ppm/°C, Voltage Rating=150V, Case/Package=0805, Category="Chip SMD Resistors", ComponentLink1Description=https://datasheet.ciiva.com/11808/0900766b8106beab-11808151.pdf?src-supplier=Rs, ComponentLink1URL=https://datasheet.ciiva.com/11808/0900766b8106beab-11808151.pdf?src-supplier=Rs, ComponentLink2Description=https://datasheet.ciiva.com/46447/444164-46447563.pdf?src-supplier=Element14, ComponentLink2URL=https://datasheet.ciiva.com/46447/444164-46447563.pdf?src-supplier=Element14, ComponentLink3Description=https://datasheet.ciiva.com/2456/pyu-r-int-thick-7-2456973.pdf?src-supplier=Digikey, ComponentLink3URL=https://datasheet.ciiva.com/2456/pyu-r-int-thick-7-2456973.pdf?src-supplier=Digikey, ComponentLink4Description=https://datasheet.ciiva.com/2456/pyu-r-int-thick-7-2456974.pdf?src-supplier=Digikey, ComponentLink4URL=https://datasheet.ciiva.com/2456/pyu-r-int-thick-7-2456974.pdf?src-supplier=Digikey, ComponentLink5Description=https://datasheet.ciiva.com/2456/pyu-r-int-thick-7-2456972.pdf?src-supplier=Digikey, ComponentLink5URL=https://datasheet.ciiva.com/2456/pyu-r-int-thick-7-2456972.pdf?src-supplier=Digikey, ComponentLink6Description=https://datasheet.ciiva.com/12669/rc0805-12669688.pdf?src-supplier=Mouser, ComponentLink6URL=https://datasheet.ciiva.com/12669/rc0805-12669688.pdf?src-supplier=Mouser, Construction=Rectangular, Depth=1.25mm, Features="Moisture Resistant", Height=0.024inch, Lead Free="Lead Free", Length=0.079inch, Military Standard=Not, Number of Terminations=2, Packaging="Tape and Reel", Power Rating=125mW, Pricing="1=24.917 (CHF)", Reach SVHC Compliant=Unknown, RoHS=Yes, RoHS Compliant=Yes, Series=RC, Stock=360000, Supplier=Rs, Technology="THICK FILM", Termination=SMD/SMT, Tolerance=1%, Voltage Rating (AC)=150V, Width=0.049inch
R26: library part Rpot_5K, "Cermet Not Linear VERTICAL Trimmer Potentiometer 卤10% 280deg 500mW 85C", Manufacturer=Bourns, Manufacturer Part Number=3386P-1-502LF, Supplier Part Number=5222772P, Voltage Rating (AC)=300V, Category="Variable Resistors and Potentiometers", ComponentLink1Description=https://datasheet.ciiva.com/11831/0900766b8069ccf9-11831043.pdf?src-supplier=Rs, ComponentLink1URL=https://datasheet.ciiva.com/11831/0900766b8069ccf9-11831043.pdf?src-supplier=Rs, ComponentLink2Description=https://datasheet.ciiva.com/27051/1158379-27051564.pdf?src-supplier=Jameco, ComponentLink2URL=https://datasheet.ciiva.com/27051/1158379-27051564.pdf?src-supplier=Jameco, ComponentLink3Description=https://datasheet.ciiva.com/29122/447392-da-01-en-trimmer-tht3386p-1-502lf-5k-0-5w-29122217.pdf?src-supplier=Conrad, ComponentLink3URL=https://datasheet.ciiva.com/29122/447392-da-01-en-trimmer-tht3386p-1-502lf-5k-0-5w-29122217.pdf?src-supplier=Conrad, ComponentLink4Description=https://datasheet.ciiva.com/2156/3386-2156421.pdf?src-supplier=Digikey, ComponentLink4URL=https://datasheet.ciiva.com/2156/3386-2156421.pdf?src-supplier=Digikey, ComponentLink5Description=https://datasheet.ciiva.com/5005/3386-21463-5005193.pdf?src-supplier=Mouser, ComponentLink5URL=https://datasheet.ciiva.com/5005/3386-21463-5005193.pdf?src-supplier=Mouser, ComponentLink6Description=https://datasheet.ciiva.com/14108/sa3386-dat-e-14108981.pdf?src-supplier=Distrelec, ComponentLink6URL=https://datasheet.ciiva.com/14108/sa3386-dat-e-14108981.pdf?src-supplier=Distrelec, ComponentLink7Description=https://datasheet.ciiva.com/16714/70153604-16714749.pdf?src-supplier=Allied+Electronics, ComponentLink7URL=https://datasheet.ciiva.com/16714/70153604-16714749.pdf?src-supplier=Allied+Electronics, ComponentLink8Description=https://datasheet.ciiva.com/7953/1815119-7953130.pdf?src-supplier=Element14, ComponentLink8URL=https://datasheet.ciiva.com/7953/1815119-7953130.pdf?src-supplier=Element14, Pricing="10=1.166, 100=1.029, 500=0.871, 1000=0.798 (CHF)", RoHS=Yes, Stock=436, Supplier=Rs
SW1: library part SWITCH_SPST-NO, "Switch Tactile N.O. SPST Round Button Gull Wing 0.05A 12VDC 1000000Cycles 1.57N SMD Reel", Color=46Colour, Manufacturer="Wurth Electronics", Supplier Part Number=7856260, Voltage Rating=12V, Category="Tactile Switches", ComponentLink1Description=https://datasheet.ciiva.com/30466/0900766b8126d19d-30466797.pdf?src-supplier=Rs, ComponentLink1URL=https://datasheet.ciiva.com/30466/0900766b8126d19d-30466797.pdf?src-supplier=Rs, ComponentLink2Description=https://datasheet.ciiva.com/29189/711706-da-01-en-taster-430182043816-29189278.pdf?src-supplier=Conrad, ComponentLink2URL=https://datasheet.ciiva.com/29189/711706-da-01-en-taster-430182043816-29189278.pdf?src-supplier=Conrad, ComponentLink3Description=https://datasheet.ciiva.com/1532/4301x2-1532481.pdf?src-supplier=Element14, ComponentLink3URL=https://datasheet.ciiva.com/1532/4301x2-1532481.pdf?src-supplier=Element14, Contact Plating=159ConductorMaterial, Diameter=3.5mm, Manufacturer Part Number=430182043816, Pricing="1=0.536, 10=0.483, 25=0.441, 50=0.399, 100=0.378 (CHF)", RoHS=Yes, Stock=91, Supplier=Rs
SW2 SW3 SW4 SW5: library part "SPST SW", closed=0, Rclosed=1m, Ropen=1Meg, SimulationGenericComponent=True
U1: library part CMP-03913-104891430-1, "173950336 WPME-FDSM Fixed Step Down Regulator Module", Ambient Temperature Range High=85°C, Ambient Temperature Range Low=-40°C, Max Input Voltage=36V, Max Operating Temperature=125°C, Max Output Voltage=3.3V, Max Switching Frequency=520kHz, Min Input Voltage=4.75V, Output Current=500mA, Height=10.16mm, Length=11.6mm, Min Operating Temperature=-40°C, NexarPartId=104891430, RoHS=Compliant, Width=7.55mm
U2: "Character Display STN Transflective 20Char x 4Line 16-Pin", Manufacturer="Newhaven Display", Supplier Part Number=NHD-0420AZ-FSW-GBW-33V3-ND, ComponentLink1Description=https://datasheet.ciiva.com/2102/nhd-0420az-fsw-gbw-33v3-2102502.pdf?src-supplier=Digikey, ComponentLink1URL=https://datasheet.ciiva.com/2102/nhd-0420az-fsw-gbw-33v3-2102502.pdf?src-supplier=Digikey, ComponentLink2Description=https://datasheet.ciiva.com/30249/6nhd-0420az-fsw-gbw-33v3-30249785.pdf?src-supplier=Onlinecomponents.com, ComponentLink2URL=https://datasheet.ciiva.com/30249/6nhd-0420az-fsw-gbw-33v3-30249785.pdf?src-supplier=Onlinecomponents.com, ComponentLink3Description=https://datasheet.ciiva.com/24396/6nhd-0420az-fsw-gbw-33v3-24396711.pdf?src-supplier=Onlinecomponents.com, ComponentLink3URL=https://datasheet.ciiva.com/24396/6nhd-0420az-fsw-gbw-33v3-24396711.pdf?src-supplier=Onlinecomponents.com, ComponentLink4Description=https://datasheet.ciiva.com/49271/70518142-49271835.pdf?src-supplier=Allied+Electronics, ComponentLink4URL=https://datasheet.ciiva.com/49271/70518142-49271835.pdf?src-supplier=Allied+Electronics, Manufacturer Part Number=NHD-0420AZ-FSW-GBW-33V3, Pricing="1=22, 5=20.68, 10=19.36, 50=18.26, 100=17.3801, 250=16.50004, 500=15.84006 (USD)", RoHS=Yes, Stock=4272, Supplier=Digikey
U3: library part RN4678_CLICK_SOCKET, "RN4678 Click Bluetooth Communications Module", Manufacturer=mikroElektronika, Supplier Part Number=1683004, Category="RF Semiconductors and Devices", ComponentLink1Description=https://download.mikroe.com/documents/datasheets/bluetooth-4.2-dual-mode-module-datasheet.pdf?src-supplier=Digikey, ComponentLink1URL=https://download.mikroe.com/documents/datasheets/bluetooth-4.2-dual-mode-module-datasheet.pdf?src-supplier=Digikey, Manufacturer Part Number=MIKROE-2545, Pricing="1=37.013, 2=35.532, 5=33.947, 10=33.065, 25=32.256 (CHF)", RoHS=No, Stock=16, Supplier=Rs
U4: library part RTC, "Real Time Clock Serial 64byte Clock/Calendar/Alarm/Battery Backup Automotive 8-Pin SOIC N Tube", Manufacturer=Microchip, Manufacturer Part Number=MCP79411-I/SN, Supplier Part Number=7985267P, Category="Real Time Clocks", ComponentLink1Description=https://datasheet.ciiva.com/8145/22266b-8145061.pdf?src-supplier=Avnet, ComponentLink1URL=https://datasheet.ciiva.com/8145/22266b-8145061.pdf?src-supplier=Avnet, ComponentLink2Description=https://datasheet.ciiva.com/6667/22266d-6667782.pdf?src-supplier=Digikey, ComponentLink2URL=https://datasheet.ciiva.com/6667/22266d-6667782.pdf?src-supplier=Digikey, Pricing="30=1.264, 100=1.203 (CHF)", RoHS=Yes, Stock=2150, Supplier=Rs
U5: library part CMP-0048-00048-2, "High Performance 80 MHz MIPS-Based 32-Bit Flash Microcontroller with USB, CAN and Ethernet, 512KB Program Memory, 64-pin TQFP, Industrial Temperature, Tape and Reel", Code_JEDEC=MS-026, ComponentLink1Description=Datasheet, ComponentLink1URL=http://ww1.microchip.com/downloads/en/DeviceDoc/61156G.pdf, ComponentLink2Description="Packaging Specification", ComponentLink2URL=http://ww1.microchip.com/downloads/en/PackagingSpec/en012702.pdf, ComponentLink3Description="Microchip.com Home", ComponentLink3URL=http://www.microchip.com/, DatasheetVersion="revG, May-2011", PackageDescription="64-Lead Thin Plastic Quad Flat Pack (PT) - 10x10x1mm Body, 2.00mm [TQFP]", PackageReference=TQFP-PT64, PackageVersion="revBB, Aug-2009", RevisionNote="Component URLs added. DatasheetVersion updated. Pin names updated."
V1: library part Battery, "pile 3V", DC Magnitude=3V, SimulationGenericComponent=True
X1: "Conn Terminal Block 2 POS 3.5mm Solder ST Thru-Hole 10A Box", Color=Blue,Green, Current=10A, Manufacturer="Wurth Electronics", Manufacturer Part Number=691214110002, Max Operating Temperature=105°C, Min Operating Temperature=-40°C, Supplier Part Number=8267295, Voltage=300V, Category="Terminal Blocks", ComponentLink1Description=https://datasheet.ciiva.com/824/6912141100xx-824001.pdf?src-supplier=Digikey, ComponentLink1URL=https://datasheet.ciiva.com/824/6912141100xx-824001.pdf?src-supplier=Digikey, ComponentLink2Description=https://datasheet.ciiva.com/48693/001088618-da-01-en-wr-tbl-terminal-block2141-691214110002-48693195.pdf?src-supplier=Conrad, ComponentLink2URL=https://datasheet.ciiva.com/48693/001088618-da-01-en-wr-tbl-terminal-block2141-691214110002-48693195.pdf?src-supplier=Conrad, Contact Material=Brass, Contact Plating=Brass,Tin, Current Rating=10A, Height=12.2mm, Housing Material=PA66, Length=7.4mm, Mounting Technology="Through Hole", Number of Contacts=2, Number of Levels=1, Number of Positions Per Level=2, Number of Rows=1NUMBER, Pitch=3.5mm, Plating=Brass,Steel, Pricing="1=0.924, 10=0.819, 50=0.756, 500=0.672, 1000=0.619 (CHF)", Reach SVHC Compliant=Unknown, RoHS=Yes, RoHS Compliant=Yes, Series="WR-TBL Series 2141", Stock=313, Stripping Length=-6mm, Supplier=Rs, Termination=Screw, Voltage Rating=300V, Width=7.9mm, Wire Gauge (Max)=24AWG, Wire Gauge (Min)=16AWG, Wire/Cable Gauge=24AWG
X2 X3 X4 X5 X6: "THT Vertical Pin Header WR-PHD, Pitch 2.54 mm, Single Row, 4 pins", Color=Black, Contact Resistance=20mR, Current Rating=3A, Manufacturer="Wurth Electronics", Manufacturer Part Number=61300411121, Max Operating Temperature=105°C, Min Operating Temperature=-40°C, Operating Supply Voltage=250V, Supplier Part Number=8281594P, Category="Headers and Wire Housings", ComponentLink1Description=http://www.farnell.com/cad/1737268.pdf?src-supplier=Element14, ComponentLink1URL=http://www.farnell.com/cad/1737268.pdf?src-supplier=Element14, ComponentLink2Description=https://datasheet.octopart.com/61300411121-W%C3%BCrth-Elektronik-datasheet-21154836.pdf?src-supplier=Element14, ComponentLink2URL=https://datasheet.octopart.com/61300411121-W%C3%BCrth-Elektronik-datasheet-21154836.pdf?src-supplier=Element14, ComponentLink3Description=https://katalog.we-online.de/em/datasheet/6130xx11121.pdf?src-supplier=Digikey, ComponentLink3URL=https://katalog.we-online.de/em/datasheet/6130xx11121.pdf?src-supplier=Digikey, Contact Material=Copper, Contact Mating Length=0.236inch, Contact Plating=Gold, Contact Type="Male Pin", Gender=Male, Height=8.89mm, Lead Free="Lead Free", Mounting Technology="Through Hole", Number of Contacts=4, Number of Positions=4, Number of Rows=1, Orientation=5495OrientationType, Packaging=Bulk, Pitch=0.1inch, Pricing="250=0.08, 500=0.078, 2500=0.076, 5000=0.074 (CHF)", Reach SVHC Compliant=Unknown, RoHS=Yes, RoHS Compliant=Yes, Series=WR-PHD, Stock=2885, Supplier=Rs, Termination=Solder, Voltage Rating=250V
X7: library part CMP-1502-01068-2_1, "THT Vertical Pin Header WR-PHD, Pitch 2.54 mm, Single Row, 6 pins", Color=Black, Contact Resistance=20mΩ, Current Rating=3A, Manufacturer="Wurth Electronics", Max Operating Temperature=105°C, Min Operating Temperature=-40°C, Operating Supply Voltage=250V, Category="Headers and Wire Housings", ComponentLink1Description=http://www.mouser.com/ds/2/445/6130xx11121-538006.pdf?src-supplier=Mouser, ComponentLink1URL=http://www.mouser.com/ds/2/445/6130xx11121-538006.pdf?src-supplier=Mouser, ComponentLink2Description=http://www.farnell.com/cad/1737268.pdf?src-supplier=Element14, ComponentLink2URL=http://www.farnell.com/cad/1737268.pdf?src-supplier=Element14, ComponentLink3Description=https://datasheet.octopart.com/61300611121-W%C3%BCrth-Elektronik-datasheet-21154836.pdf?src-supplier=Element14, ComponentLink3URL=https://datasheet.octopart.com/61300611121-W%C3%BCrth-Elektronik-datasheet-21154836.pdf?src-supplier=Element14, ComponentLink4Description=https://katalog.we-online.de/em/datasheet/6130xx11121.pdf?src-supplier=Digikey, ComponentLink4URL=https://katalog.we-online.de/em/datasheet/6130xx11121.pdf?src-supplier=Digikey, Connector Type="Male Pin", Contact Gender=Male, Contact Material=Copper, Contact Mating Length=5.9944mm, Contact Plating=Gold, Contact Type="Male Pin", Gender=Male, Height=8.89mm, Housing Material=PBT, Lead Free="Lead Free", Lead Pitch=2.54mm, Manufacturer Part Number=61300611121, Mount="Through Hole", NexarPartId=32855526, Number of Contacts=5, Number of Pins=5, Number of Positions=5, Number of Rows=1, Orientation=Vertical, Packaging=Bulk, Pitch=2.54mm, Pricing 1="125=0,153, 500=0,149, 2500=0,147, 5000=0,141 (CHF)", REACH SVHC=Unknown, Reach SVHC Compliant=Unknown, RoHS=Compliant, RoHS Compliant=Yes, Series=WR-PHD, Stock 1=2555, Supplier 1=Rs, Termination=Solder, Voltage Rating=250V
X8 X9 X10 X11: library part TEST_POINT_SMD, "Test Point, Mini, SMT, Phos Bronze/Silver, 1000pc Tape & Reel", Manufacturer=Keystone, Manufacturer Number=5011, Package Quantity=1, Supplier Part Number=2529475, Supplier Part Number 1=MAG.428.014, Body Material=Bronze, Category=Connectors, Component Type=Connectors, ComponentLink1Description=https://datasheet.ciiva.com/16318/m60-2p61-16318395.pdf?src-supplier=Future+Electronics, ComponentLink1URL=https://datasheet.ciiva.com/16318/m60-2p61-16318395.pdf?src-supplier=Future+Electronics, ComponentLink2Description=https://datasheet.ciiva.com/14848/m60-2p61-14848438.pdf?src-supplier=Digikey, ComponentLink2URL=https://datasheet.ciiva.com/14848/m60-2p61-14848438.pdf?src-supplier=Digikey, ComponentLink3Description=https://datasheet.ciiva.com/14848/m60-2p61-14848439.pdf?src-supplier=Digikey, ComponentLink3URL=https://datasheet.ciiva.com/14848/m60-2p61-14848439.pdf?src-supplier=Digikey, ComponentLink4Description=https://datasheet.ciiva.com/14848/m60-2p61-14848437.pdf?src-supplier=Digikey, ComponentLink4URL=https://datasheet.ciiva.com/14848/m60-2p61-14848437.pdf?src-supplier=Digikey, ComponentLink5Description=https://datasheet.ciiva.com/16885/70182998-16885945.pdf?src-supplier=Allied+Electronics, ComponentLink5URL=https://datasheet.ciiva.com/16885/70182998-16885945.pdf?src-supplier=Allied+Electronics, Contact Material=Bronze, Contact Plating=Silver, Height=0.09inch, IsStocked=True, Lead Free="Lead Free", Manufacturer Part Number=5011, Material=Bronze, Mounting Technology="Surface Mount,PCB", Packaging="Tape and Reel", Pins=1, Plating=Silver, PN=PN-926990, Pricing="1=0.331, 10=0.302, 25=0.274, 50=0.251, 100=0.227, 250=0.204 (CHF)", Reach SVHC Compliant=No, RoHS=Yes, RoHS Compliant=Yes, Series=5019, Stock=8402, SubCategory=Testpoints, Supplier=Farnell, Supplier 1=ETML, Supplier Price 1=0.2439, Termination=SMD/SMT
X12 X13 X14 X15 X16 X17 X18 X19 X20 X21 X22 X23 X24 X25 X26 X27: library part TEST_POINT_THT, "TEST POINT, PCB, THROUGH HOLE; Product R; Range: -; Connector Colour: Black; Mounting: Through Hole", Manufacturer=Keystone, Supplier Part Number=2042652, Supplier Part Number 1=MAG.428.014, Category=Connectors, Component Type=Connectors, ComponentLink1Description=https://datasheet.ciiva.com/11744/0900766b8009b7c7-11744935.pdf?src-supplier=Rs, ComponentLink1URL=https://datasheet.ciiva.com/11744/0900766b8009b7c7-11744935.pdf?src-supplier=Rs, ComponentLink2Description=https://datasheet.ciiva.com/1454/1718230-1454834.pdf?src-supplier=Element14, ComponentLink2URL=https://datasheet.ciiva.com/1454/1718230-1454834.pdf?src-supplier=Element14, ComponentLink3Description=https://datasheet.ciiva.com/46412/1703983-46412138.pdf?src-supplier=Element14, ComponentLink3URL=https://datasheet.ciiva.com/46412/1703983-46412138.pdf?src-supplier=Element14, ComponentLink4Description=https://datasheet.ciiva.com/16351/m60-2p60-16351093.pdf?src-supplier=Future+Electronics, ComponentLink4URL=https://datasheet.ciiva.com/16351/m60-2p60-16351093.pdf?src-supplier=Future+Electronics, ComponentLink5Description=https://datasheet.ciiva.com/2917/5011-2917635.pdf?src-supplier=Digikey, ComponentLink5URL=https://datasheet.ciiva.com/2917/5011-2917635.pdf?src-supplier=Digikey, IsStocked=True, Manufacturer Number=5011, Manufacturer Part Number=5011, PN=PN-926990, Pricing="100=0.37, 500=0.359, 1000=0.35, 4000=0.34 (CHF)", RoHS=Yes, Stock=1300, SubCategory=Testpoints, Supplier=Rs, Supplier 1=ETML, Supplier Price 1=0.2439
Y1: library part "MC-306 32.7680K-A3: ROHS", "CRYSTAL 32.7680KHZ 12.5PF SMD", Manufacturer=Epson, Manufacturer Part Number=MC-30632.7680K-A3:ROHS, Supplier Part Number=SER4306CT-ND, Category=Crystals, ComponentLink1Description=https://datasheet.ciiva.com/26941/getdatasheetpartid-777847-26941728.pdf?src-supplier=Verical, ComponentLink1URL=https://datasheet.ciiva.com/26941/getdatasheetpartid-777847-26941728.pdf?src-supplier=Verical, Copyright="Copyright (C) 2024 Ultra Librarian. All rights reserved.", Manufacturer_Part_Number="MC-306 32.7680K-A3: ROHS", Mfr_Name=Epson, Pricing="1=2.61, 10=2.545, 50=2.424, 100=2.121 (USD)", RefDes=RefDes, RoHS=Yes, Stock=10888, Supplier=Digikey, Type=DEV
Y2: library part XTAL, "Crystal 8MHz ±30ppm (Tol) ±50ppm (Stability) 18pF FUND 60Ohm 2-Pin HC-49/US SM SMD T/R", Manufacturer=CTS, Manufacturer Part Number=ATS080BSM-1, Category=Crystals, ComponentLink1Description=https://datasheet.ciiva.com/16413/008-0309-0-16413903.pdf?src-supplier=Future+Electronics, ComponentLink1URL=https://datasheet.ciiva.com/16413/008-0309-0-16413903.pdf?src-supplier=Future+Electronics, ComponentLink2Description=https://datasheet.ciiva.com/26926/getdatasheetpartid-488404-26926661.pdf?src-supplier=Verical, ComponentLink2URL=https://datasheet.ciiva.com/26926/getdatasheetpartid-488404-26926661.pdf?src-supplier=Verical, ComponentLink3Description=https://datasheet.ciiva.com/3176/008-0309-0-3176343.pdf?src-supplier=Avnet, ComponentLink3URL=https://datasheet.ciiva.com/3176/008-0309-0-3176343.pdf?src-supplier=Avnet, ComponentLink4Description=https://datasheet.ciiva.com/852/008-0309-0-852310.pdf?src-supplier=Digikey, ComponentLink4URL=https://datasheet.ciiva.com/852/008-0309-0-852310.pdf?src-supplier=Digikey, ComponentLink5Description=https://datasheet.ciiva.com/852/008-0309-0-852311.pdf?src-supplier=Digikey, ComponentLink5URL=https://datasheet.ciiva.com/852/008-0309-0-852311.pdf?src-supplier=Digikey, ComponentLink6Description=https://datasheet.ciiva.com/852/008-0309-0-852312.pdf?src-supplier=Digikey, ComponentLink6URL=https://datasheet.ciiva.com/852/008-0309-0-852312.pdf?src-supplier=Digikey, LatestRevisionDate=17-Jul-2002, LatestRevisionNote="Re-released for DXP Platform.", PackageDescription="Crystal, Thru-Hole; 2 Leads; Body 3.1 x 8.2 mm (Dia.xH)", PackageReference=R38, Pricing 1="1000=0,14104, 2500=0,1386, 5000=0,13616, 10000=0,13372, 20000=0,13128 (USD)", Published=8-Jun-2000, Publisher="Altium Limited", RoHS=Yes, Stock 1=10000, Supplier 1=Avnet, Supplier Part Number 1=ATS080BSM-1

## Free pads (board coordinates)
  round 4 hole 3.2 unplated: 1(4.5,81.15) 2(4.5,25.15) 3(102.5,25.15) 4(102.5,81.1)

## Via types
v1: diameter 0.65, hole 0.3, Top Layer to Bottom Layer, tented both sides, 66 vias
v2: diameter 0.65, hole 0.3, Top Layer to Bottom Layer, 63 vias

## Nets (pads, with @x,y where several pads share a name; then routed paths per layer and width w, separated by ;. In a path a pad name is that pad's centre, name@x,y a point inside that pad or via, vN(x,y) a via of type N, cw(c..) or ccw(c..) an arc to the next point about the centre after c; other vN are vias at no path point)
3.3V: C3.2 C5.2 C6.2 C7.2 C8.2 C9.2 C10.2 D5.4 D6.4 R1.3 R2.2 R3.2 R7.2 R8.2 R9.2 R14.2 R16.2 R17.2 R18.2 R19.2 U1.3 U2.2 U3.10 U4.8 U5.10 U5.16 U5.19 U5.26 U5.35 U5.38 U5.57 X6.1 X7.2 X9.1 | length 515.3
  Top Layer w0.5: R1.3 15.5,50.67 ; U2.2 24.85,53.755 21.765,50.67 15.5,50.67 ; v2@36.768,34.818 18.835,34.818 18.121,35.531 X6.1 15.5,38.071 15.5,50.67 ; v2(36.809,34.818) 36.836,34.791 v2(47.392,34.791) v2(66.358,34.791) 66.375,34.808 68.905,34.808 v2(68.922,34.826) ; U3.10 48.292,73.722 v2(48.292,81.343) 48.292,89.192 56.461,97.361 v2(59.295,97.361) 63.111,97.361 66.75,101 X9.1 v2(73.05,101) ; v2(47.392,39.726) v2(47.392,44.948) ; v2(59.441,56.455) 67.115,56.455 67.383,56.722 75.262,56.722 X7.2 ; U1.3 94.03,85.265 94.855,84.44 C3.2 94.76,82.405 v2@94.76,80.741
  Bottom Layer w0.254: C8.2@51.279,45.827 52.041,45.827 53.42,44.448 U5.57 ; C6.2 60.859,51.832 61.365,51.325 U5.10 61.365,48.516 61.897,47.985 64.365,47.985 ; U5.38 61.865,35.276 C9.2@62.35,34.791 ; U5.35 63.365,37.251 64.832,35.784 C10.2 ; U5.16 64.365,47.985 ; U5.26 69.098,43.448 69.518,43.868 70.143,43.868 C7.2 ; U5.19 64.857,46.948 64.365,47.439 64.365,47.985
  Bottom Layer w0.5: X6.1 24.261,35.531 R8.2@24.5,35.77 ; R9.2 R8.2@24.5,35.77 ; R8.2 R8.2@24.5,35.77 ; U2.2 31.52,65.17 44.2,65.17 ; U4.8 36.054,35.531 36.768,34.818 v2(36.809,34.818) 36.802,34.811 36.802,33.652 C5.2@36.827,33.628 ; U3.10 44.2,65.17 ; v2(47.392,34.791) v2(47.392,39.726) ; v2(47.392,44.948) 47.392,46.817 48.123,47.548 50.334,47.548 50.923,46.958 50.923,46.183 C8.2 ; v2(48.292,81.343) 58.023,81.343 D5.4 ; R2.2 44.2,65.17 ; D6.4 v2(59.295,97.361) ; v2(59.441,56.455) 59.441,56.414 59.238,56.212 59.238,54.322 59.766,53.794 60.706,53.794 C6.2 ; C9.2 C10.2 v2(66.358,34.791) ; v2(68.922,34.826) 77.852,34.826 83.02,39.994 83.02,53.846 ; C7.2@70.415,44.463 71.402,45.45 72.442,45.45 76.54,49.548 76.54,53.846 ; v2(73.05,101) 86,101 98,89 98,83.94 v2(94.76,80.7) 94.76,64.637 ; X7.2 76.54,53.846 ; R14.2 94.76,64.637 ; R3.2 87.5,7 97.1,16.6 97.1,26.75 105.5,35.15 105.5,36 ; U1.3 U1.3@94.221,86.809 ; R17.2 105.5,36 ; R19.2 105.5,43 ; R18.2 105.5,50 ; R16.2 105.5,57 ; 76.54,53.846 83.02,53.846 ; 83.02,53.846 89.501,53.846 94.76,59.105 94.76,64.637 ; 94.76,64.637 102.243,64.637 105.5,61.38 105.5,57 ; 105.5,36 105.5,43 ; 105.5,43 105.5,50 ; 105.5,50 105.5,57
BT_RTS_N: U3.15 U5.54 | length 41
  Top Layer w0.254: U3.15 41.36,59.77 41.36,55.134 45.861,50.633 v2(45.888,50.633)
  Bottom Layer w0.254: v2(45.888,50.633) 45.888,44.453 47.392,42.948 U5.54
BT_SW_BTN: U3.16 U5.53 | length 42.9
  Top Layer w0.254: U3.16 38.81,59.78 38.81,55.469 44.406,49.873 v2(44.943,49.873)
  Bottom Layer w0.254: v2(44.943,49.873) 44.943,44.702 47.197,42.448 U5.53
BT_UART_CTS: U3.2 U5.49 X17.1 | length 91.4
  Top Layer w0.254: U3.2 29.903,94.087 27.985,94.087 26.999,93.102 26.999,66.601 33.85,59.75 33.85,52.001 v2(46.125,39.726)
  Bottom Layer w0.254: X17.1 26.05,94.75 29.24,94.75 U3.2 ; v2(46.125,39.726) 46.847,40.448 U5.49
BT_UART_RTS: U3.14 U5.43 X23.1 | length 103.6
  Top Layer w0.254: v2(25.666,50.878) 31.594,50.878 43.658,38.814 52.925,38.814 54.075,39.963 v1(59.365,39.963)
  Bottom Layer w0.254: X23.1 21.04,94.76 34.04,81.76 U3.14 23.79,59.38 23.79,58.696 ccw(c24.85,58.5) 23.79,58.304 23.79,52.754 23.864,52.679 v2(25.666,50.878) ; U5.43 v1(59.365,39.963)
BT_UART_RX: U3.3 U5.50 X16.1 | length 93.8
  Top Layer w0.254: U3.3 31.73,94.8 27.875,94.8 26.387,93.312 26.387,64.338 31.05,59.675 31.05,53.948 45.17,39.828 v2(45.17,39.726)
  Bottom Layer w0.254: X16.1 33.094,92.706 33.824,92.706 U3.3 ; v2(45.17,39.726) 46.392,40.948 U5.50
BT_UART_TX: U3.4 U5.51 X22.1 | length 97.1
  Top Layer w0.254: U3.4 33.695,95.375 27.615,95.375 25.925,93.685 25.925,62.4 28.591,59.734 28.591,55.132 v2(43.974,39.749)
  Bottom Layer w0.254: X22.1 36.58,94.22 U3.4 ; v2(43.974,39.749) 45.663,41.438 48.995,41.438 49.005,41.448 U5.51
BT_UART_WK_UP: U3.1 U5.52 | length 68.2
  Top Layer w0.254: U3.1 27.675,91.205 27.675,68.465 36.263,59.877 36.263,50.907 v2(45.17,42)
  Bottom Layer w0.254: v2(45.17,42) 45.222,41.948 U5.52
BTN0: R16.1 SW3.2 U5.55 | length 58.1
  Top Layer w0.254: v1(59.365,40.855) 81.085,40.855 SW3.2